# EAGLE board otherplan716_padNotRendered (EAGLE 6.5.0)
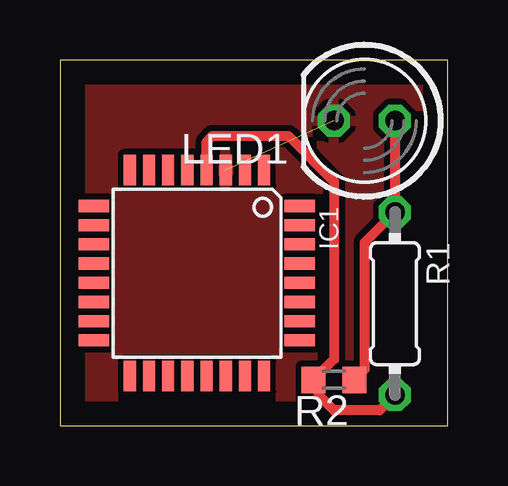
[diagram p0: board, top side]

Size 16.18 x 15.23 mm. Coordinates in mm from the lower left corner, seen from the top.
Outline: 0,0 16.18,0 16.18,15.23 0,15.23 0,0
Copper layers (1*16): Top 0.035mm / dielectric 1.5mm / Bottom 0.035mm
Design rules "default *": minimum track width 10mil, minimum drill 24mil, track to track 10mil, track to pad 10mil, pad to pad 10mil, via to via 10mil, smd to smd 10mil, copper to edge 40mil, drill to drill 8mil, minimum pad ring 10mil, minimum via ring 8mil, stop-mask expansion 4mil, vias tented up to drill 0mil, thermal gap 10mil

## Footprints (pad centres in the part's own frame; a part is rotated, then mirrored left to right if it is on the bottom)
TQFP32-08 = smd 1.27 x 0.508: 1 -4.293,2.8; 2 -4.293,2; 3 -4.293,1.2; 4 -4.293,0.4; 5 -4.293,-0.4; 6 -4.293,-1.2; 7 -4.293,-2; 8 -4.293,-2.8; 17 4.293,-2.8; 18 4.293,-2; 19 4.293,-1.2; 20 4.293,-0.4; 21 4.293,0.4; 22 4.293,1.2; 23 4.293,2; 24 4.293,2.8 | smd 0.508 x 1.27: 9 -2.8,-4.293; 10 -2,-4.293; 11 -1.2,-4.293; 12 -0.4,-4.293; 13 0.4,-4.293; 14 1.2,-4.293; 15 2,-4.293; 16 2.8,-4.293; 25 2.8,4.293; 26 2,4.293; 27 1.2,4.293; 28 0.4,4.293; 29 -0.4,4.293; 30 -1.2,4.293; 31 -2,4.293; 32 -2.8,4.293
LED5MM = drill 0.813 octagon: A -1.27,0; K 1.27,0
0204/7 = drill 0.813 octagon: 1 -3.81,0; 2 3.81,0
R0603 = smd 1 x 1.1: 1 -0.85,0; 2 0.85,0

## Placement (x,y rotation side)
IC1  ATMEGA32U2-TQFP  [TQFP32-08]  5.71,6.35 270 top
LED1  [LED5MM]  12.7,12.7 180 top
R1  [0204/7]  13.97,5.08 270 top
R2  [R0603]  11.43,1.91 180 top

## Library data of the parts
IC1 = adafruit
LED1 = led
R1 R2 = rcl

## Nets
GND: IC1.3 LED1.K
N$2: LED1.A R1.1 R2.1
VCC: IC1.4 R1.2 R2.2

## Tracks (layer width: path | path; a pad name or v marks a point on that pad's centre or on a via)
GND  (1 unrouted)
  pour Top: 0,0 16.51,0 16.51,15.24 0,15.24
N$2
  Top 0.406: LED1.A R1.1 12.7,7.62 12.7,2.33 R2.1
VCC
  Top 0.406: R1.2 13.34,0.64 11.43,0.64 10.79,1.27 10.79,1.69 R2.2 11.43,2.75 11.43,10.16 9.53,12.06 6.35,12.06 6.12,11.83 IC1.4